# EAGLE board Timer_CMD (EAGLE 7.0.0)
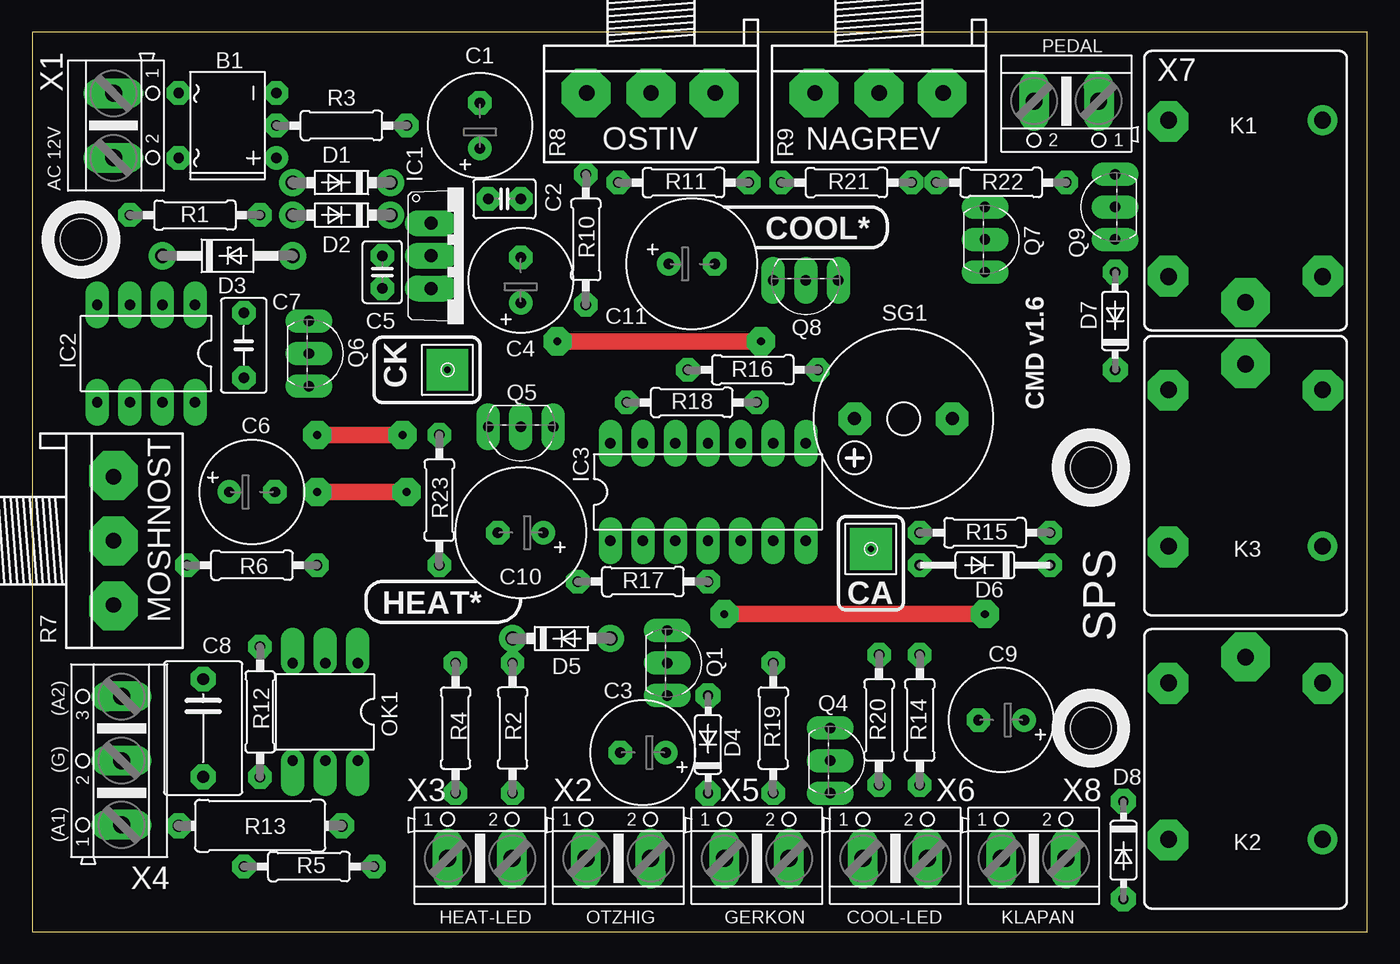
[diagram p0: board, top side]
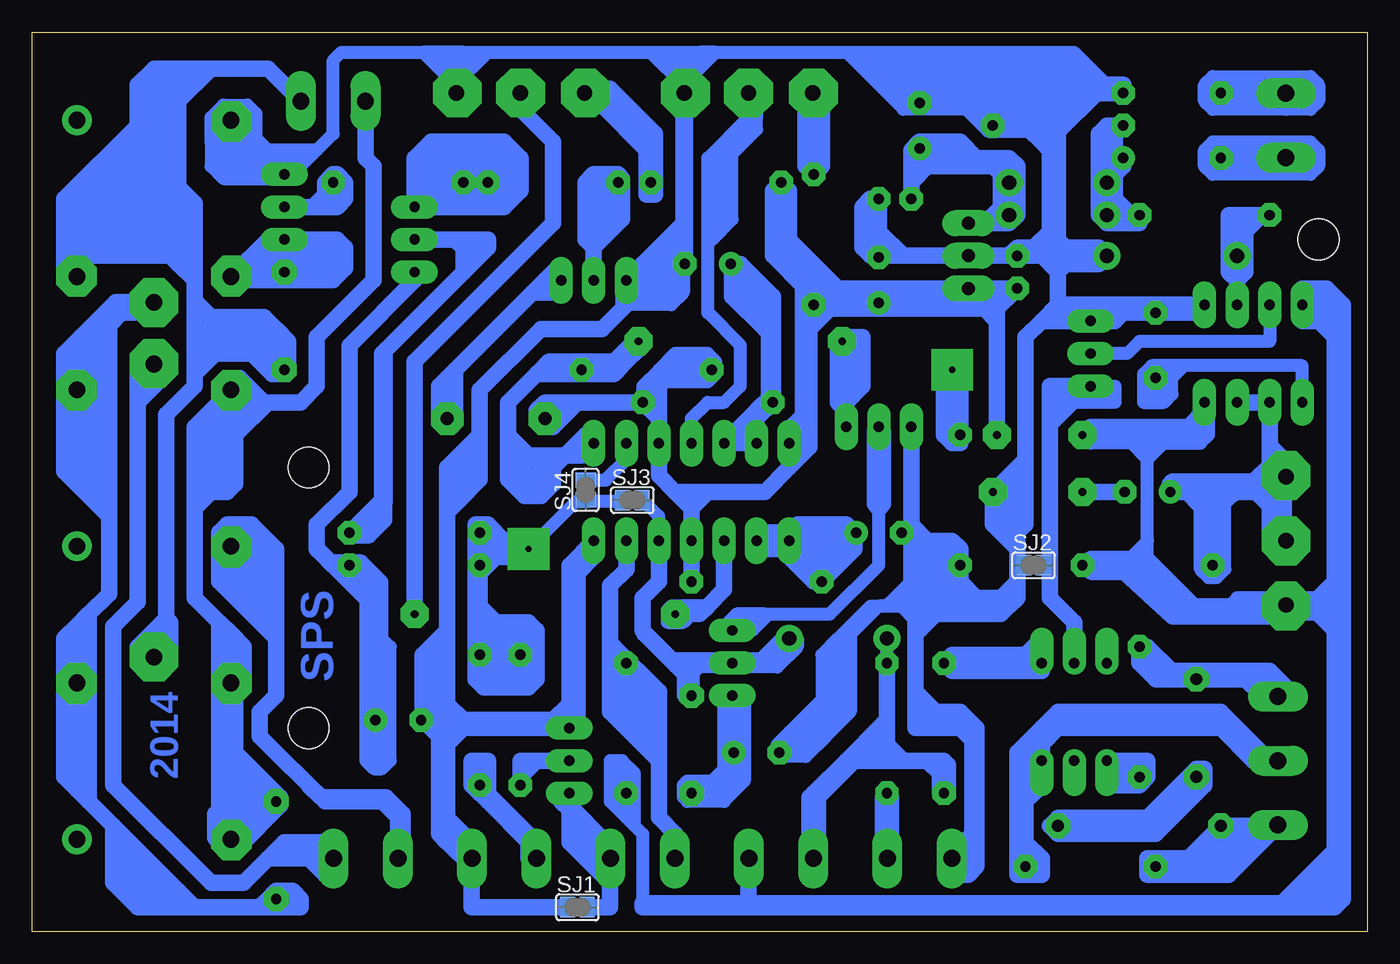
[diagram p1: board, bottom side, seen from below]

Size 104.12 x 70.16 mm. Coordinates in mm from the lower left corner, seen from the top.
Outline: 0,0 104.12,0 104.12,70.16 0,70.16 0,0
Copper layers (1*16): Top 0.035mm / dielectric 1.5mm / Bottom 0.035mm
Design rules "default *": minimum track width 10mil, minimum drill 24mil, track to track 8mil, track to pad 8mil, pad to pad 8mil, via to via 8mil, smd to smd 8mil, copper to edge 40mil, drill to drill 8mil, minimum pad ring 20mil, minimum via ring 8mil, stop-mask expansion 4mil, vias tented up to drill 0mil, thermal gap 10mil
Holes 3.2 mm at 3.81,53.98 82.55,36.2 82.55,15.88

## Footprints (pad centres in the part's own frame; a part is rotated, then mirrored left to right if it is on the bottom)
DB = drill 0.813: + -2.54,-3.81 | drill 0.813 octagon: - 2.54,-3.81; AC1 2.54,3.81; AC2 -2.54,3.81
E3,5-8 = drill 0.813 pad 1.6: + -1.778,0 | drill 0.813 pad 1.6 octagon: - 1.778,0
C025-030X050 = drill 0.813 octagon: 1 -1.27,0; 2 1.27,0
C050-035X075 = drill 0.813 octagon: 1 -2.54,0; 2 2.54,0
C075-063X106 = drill 0.914 octagon: 1 -3.81,0; 2 3.81,0
E3,5-10 = drill 0.813 pad 1.6: + -1.778,0 | drill 0.813 pad 1.6 octagon: - 1.778,0
DO41-7.6 = drill 1.1 pad 1.7: A 3.81,0; C -3.81,0
DO41Z10 = drill 1.118: A 5.08,0; C -5.08,0
DO35-7SQ = drill 0.813 pad 1.93 octagon: A 3.81,0; C -3.81,0
DO35-10_SQ = drill 0.813 pad 1.778 octagon: A 5.08,0; C -5.08,0
4MM-PAD-SQUARE = drill 0.5 pad 3.251 square: B2,8 0,0
TO220V = drill 1.016 long: 1 -2.54,-2.54; 2 0,-2.54; 3 2.54,-2.54
DIL-08 = drill 0.813 long: 1 -3.81,-3.81; 2 -1.27,-3.81; 3 1.27,-3.81; 4 3.81,-3.81; 5 3.81,3.81; 6 1.27,3.81; 7 -1.27,3.81; 8 -3.81,3.81
DIL14 = drill 0.813 long: 1 -7.62,-3.81; 2 -5.08,-3.81; 3 -2.54,-3.81; 4 0,-3.81; 5 2.54,-3.81; 6 5.08,-3.81; 7 7.62,-3.81; 8 7.62,3.81; 9 5.08,3.81; 10 2.54,3.81; 11 0,3.81; 12 -2.54,3.81; 13 -5.08,3.81; 14 -7.62,3.81
JS-M = drill 1.3: 1 6.7,6; 2 6.7,-6; C 8.7,0; NC -5.5,-6; NO -5.5,6
DIL06 = drill 0.813 offset: 1 -2.54,-3.81; 2 0,-3.81; 3 2.54,-3.81; 4 2.54,3.81; 5 0,3.81; 6 -2.54,3.81
TO92-EBC = drill 0.813 long: B 0,-1.27; C -2.54,-1.27; E 2.54,-1.27
0207/10 = drill 0.813 octagon: 1 -5.08,0; 2 5.08,0
3RP/1610N = drill 1.2 pad 2.184: 1 -5,0; 2 0,0; 3 5,0
0411/12 = drill 0.914 octagon: 1 -6.35,0; 2 6.35,0
F/CM12P = drill 1.016 pad 2.54 octagon: + 3.81,0; - -3.81,0
SJ = smd 1.168 x 1.6: 1 -0.762,0; 2 0.762,0
AK500/2 = drill 1.321 long: 1 -2.515,0; 2 2.515,0
AK500/3 = drill 1.321 long: 1 -5.004,0; 2 0,0; 3 5.004,0

## Placement (x,y rotation side)
B1  DB107  [DB]  15.24,62.86 90 top
C1  100uF 25v  [E3,5-8]  34.92,62.86 90 top
C2  100n  [C025-030X050]  36.83,57.15 0 top
C3  10uF 25v  [E3,5-8]  47.62,13.97 180 top
C4  100uF 25v  [E3,5-8]  38.1,50.8 90 top
C5  100n  [C025-030X050]  27.3,51.43 90 top
C6  470uF 25v  [E3,5-8]  17.14,34.29 0 top
C7  100n  [C050-035X075]  16.51,45.72 90 top
C8  0.01uF 400v  [C075-063X106]  13.34,15.88 270 top
C9  10uF 25v  [E3,5-8]  75.56,16.51 180 top
C10  HEAT*  [E3,5-10]  38.1,31.12 180 top
C11  COOL*  [E3,5-10]  51.44,52.07 0 top
D1  1N5819  [DO41-7.6]  24.13,58.42 180 top
D2  1N5819  [DO41-7.6]  24.13,55.88 180 top
D3  9V1  [DO41Z10]  15.24,52.7 0 top
D4  1N4148  [DO35-7SQ]  52.7,14.61 90 top
D5  1N5819  [DO41-7.6]  41.27,22.86 0 top
D6  1N4148SQ  [DO35-10_SQ]  74.3,28.58 180 top
D7  1N4148  [DO35-7SQ]  84.45,47.62 90 top
D8  1N4148  [DO35-7SQ]  85.09,6.35 270 top
DRILEGEND  [DRILEGEND]  109.02,67.2 0 top  (outside the outline)
H1  COOL  [4MM-PAD-SQUARE]  32.38,43.81 0 top
H2  COOL  [4MM-PAD-SQUARE]  65.41,29.85 0 top
IC1  7812TV  [TO220V]  33.66,52.7 270 top
IC2  NE555  [DIL-08]  8.89,45.09 180 top
IC3  NE556  [DIL14]  52.7,34.29 0 top
K1  JS-M1-12V-4  [JS-M]  94.61,57.78 270 top
K2  JS-M1-12V-4  [JS-M]  94.61,12.7 90 top
K3  JS-M1-12V-4  [JS-M]  94.61,35.56 90 top
OK1  MOC3052  [DIL06]  22.86,17.15 180 top
Q1  BC327-40  [TO92-EBC]  50.8,20.96 270 top
Q4  BC327-40  [TO92-EBC]  63.5,13.33 270 top
Q5  BC337-40  [TO92-EBC]  38.1,38.1 180 top
Q6  BC327-40  [TO92-EBC]  22.86,45.09 270 top
Q7  BC327-40  [TO92-EBC]  75.56,53.98 270 top
Q8  BC337-40  [TO92-EBC]  60.33,49.53 180 top
Q9  BC337-40  [TO92-EBC]  83.19,56.52 90 top
R1  1k  [0207/10]  12.7,55.88 180 top
R2  1k  [0207/10]  37.47,15.88 90 top
R3  100k  [0207/10]  24.13,62.86 0 top
R4  1k  [0207/10]  33.02,15.88 270 top
R5  330  [0207/10]  21.59,5.08 0 top
R6  470k  [0207/10]  17.14,28.58 0 top
R7  20k  [3RP/1610N]  6.35,30.48 270 top
R8  100k  [3RP/1610N]  48.26,65.41 180 top
R9  100k  [3RP/1610N]  66.04,65.41 180 top
R10  1k  [0207/10]  43.18,53.98 90 top
R11  1k  [0207/10]  50.8,58.42 0 top
R12  390  [0207/10]  17.78,17.15 270 top
R13  39  [0411/12]  17.78,8.26 180 top
R14  1k  [0207/10]  69.22,16.51 90 top
R15  1k  [0207/10]  74.3,31.12 180 top
R16  10k  [0207/10]  56.2,43.81 180 top
R17  10k  [0207/10]  47.62,27.31 0 top
R18  10k  [0207/10]  51.44,41.27 0 top
R19  10k  [0207/10]  57.78,15.88 270 top
R20  1k  [0207/10]  66.04,16.51 90 top
R21  1k  [0207/10]  63.5,58.42 0 top
R22  1k  [0207/10]  75.56,58.42 180 top
R23  1k  [0207/10]  31.75,33.66 90 top
SG1  F/CM12P  [F/CM12P]  67.94,40 180 top
SJ1  [SJ]  61.59,1.91 0 bottom
SJ2  [SJ]  26.04,28.58 0 bottom
SJ3  [SJ]  57.31,33.66 0 bottom
SJ4  [SJ]  60.96,34.45 90 bottom
X1  AC 12V  [AK500/2]  6.35,62.86 270 top
X2  OTZIG  [AK500/2]  45.72,5.71 0 top
X3  LED-HEAT  [AK500/2]  34.92,5.71 0 top
X4  TRIAC  [AK500/3]  6.99,13.33 90 top
X5  GERKON  [AK500/2]  56.52,5.71 0 top
X6  LED-COOL  [AK500/2]  67.31,5.71 0 top
X7  PEDAL  [AK500/2]  80.64,64.77 180 top
X8  KLAPAN  [AK500/2]  78.11,5.71 0 top

## Library data of the parts
B1 = rectifier
C1-C11 R1-R6 R10-R23 = rcl
D1-D8 = diode
DRILEGEND = drilegend
H1 H2 = holes
IC1 = linear
IC2 = st-microelectronics; MF: Arrow Electronics; MPN: NE555N; OC_FARNELL: 1467742; OC_NEWARK: 89K1486
IC3 = st-microelectronics; MPN: NE556; OC_FARNELL: 2349784; OC_NEWARK: 83C0108
K1-K3 = relay; MPN: JSM1-12V-4; OC_FARNELL: 910338; OC_NEWARK: 13P4552
OK1 = optocoupler; MF: FAIRCHILD SEMICONDUCTOR; MPN: MOC3042-M; OC_FARNELL: 1021368; OC_NEWARK: 72K8899
Q1 Q4 Q6 Q7 = transistor-pnp
Q5 Q8 Q9 = transistor-npn
R7-R9 = pot
SG1 = buzzer; OC_FARNELL: unknown; OC_NEWARK: unknown
SJ1-SJ4 = jumper
X1-X8 = con-ptr500; OC_FARNELL: unknown; OC_NEWARK: unknown

## Nets
CLSTR: Q1.C Q5.B
COOL: D6.A H2.B2,8 R14.2 R15.2 R20.2 SJ3.1 SJ4.1
FIM: IC2.3 Q6.B
GND: B1.- C1.- C2.2 C3.- C4.- C5.2 C6.- C7.2 C9.- C10.- C11.- D3.A IC1.2 IC2.1 IC3.7 K1.NC Q4.C Q5.E Q6.C Q8.E Q9.E R3.2 R8.1 R9.1 R23.1 SJ1.1 SJ2.1 X3.1 X6.2
LOCK: Q4.B R20.1
N$1: B1.+ D1.A D2.A R1.1 R3.1
N$2: C7.1 IC2.5
N$3: R2.1 X3.2
N$4: C3.+ D4.C Q1.E
N$5: OK1.4 R12.2
N$6: D3.C IC2.2 R1.2
N$7: D5.C R2.2 R4.2 X2.1
N$8: C8.1 R12.1 X4.3
N$10: C1.+ C2.1 D1.C D2.C IC1.1
N$11: C10.+ IC3.1 IC3.2 R17.1
N$12: B1.AC2 X1.2
N$13: B1.AC1 X1.1
N$14: D4.A D5.A IC3.5 Q1.B SJ3.2
N$15: OK1.2 Q6.E SJ2.2
N$17: C4.+ C5.1 IC1.3 IC2.4 IC2.8 IC3.4 IC3.10 IC3.14 R6.2 R7.3 R10.1 R11.1 R16.2 R17.2 R18.2 R19.2 SG1.+ X2.2
N$18: R5.1 R13.2 X4.1
N$19: C8.2 R13.1
N$20: Q7.B R15.1
N$22: Q7.C R21.2 R22.2
N$23: D7.A K1.2 Q9.C
N$24: Q8.B R21.1
N$25: C11.+ IC3.12 IC3.13 R18.1
N$27: D7.C K1.1 K2.C X7.1
N$28: IC3.3 R9.2
N$29: R9.3 R11.2
N$30: IC3.11 R8.2
N$31: Q4.E SJ1.2 X5.2
N$32: R8.3 R10.2
N$33: IC3.6 R19.1 X5.1
N$34: C9.+ D6.C Q7.E
N$35: Q9.B R22.1
N$36: D8.C K2.1 K2.NO K3.1 X7.2
N$37: Q8.C SG1.-
N$38: OK1.6 R5.2 X4.2
N$40: D8.A K1.C K2.2 K3.2
N$41: K3.NO X8.1
N$42: R14.1 X6.1
N$43: H1.B2,8 R23.2
N$53: IC3.9 SJ4.2
N$64: C6.+ IC2.6 IC2.7 R6.1 R7.1 R7.2
N$65: OK1.1 R4.1
N$66: IC3.8 Q5.C R16.1
N$68: K3.C X8.2

## Tracks (layer width: path | path; a pad name or v marks a point on that pad's centre or on a via)
CLSTR
  Bottom 1.016: Q1.C 48.26,23.5 46.99,24.77 | 46.99,24.77 46.67,24.77 | 46.67,24.77 41.91,24.77 38.1,28.58 38.1,33.02 | 46.99,24.77 49.21,24.77 50.48,23.5 47.94,23.5 46.67,24.77 | 46.99,24.77 48.26,24.77 48.9,24.13
  Bottom 1.27: Q5.B 38.1,33.02 | 38.1,33.02 37.78,33.34 37.78,39.05 38.42,39.05 38.42,33.34 38.1,33.02
COOL
  Bottom 1.016: SJ3.1 58.67,33.53 60.8,33.53 SJ4.1 61.12,33.53 61.72,33.53 H2.B2,8
  Bottom 1.27: R15.2 69.22,29.85 | 69.22,29.85 D6.A 69.22,27.94 | 69.22,27.94 69.22,25.4 | 69.22,24.13 R14.2 | R14.2 R20.2 66.04,19.05 | H2.B2,8 66.67,29.85 | 67.31,29.85 69.22,29.85 | 66.04,19.05 65.41,19.05 64.77,19.69 64.77,23.5 65.41,24.13 67.94,24.13 69.22,25.4 | R14.2 69.22,19.69 68.58,19.05 | 68.58,19.05 66.04,19.05 | 68.58,19.05 68.9,19.05 69.53,19.69 69.53,30.48 69.53,31.43 | 69.22,31.75 68.58,31.75 67.31,30.48 | 68.58,30.48 67.31,30.48 | 67.31,30.48 66.67,29.85 | 66.67,29.85 67.31,29.85 | 67.31,29.85 69.22,27.94 | 69.22,25.4 69.22,24.13 | 69.22,24.13 67.94,22.86 66.04,22.86 65.41,23.5 65.41,22.23 68.58,22.23 68.58,20.32 66.67,20.32 | 69.53,31.43 69.22,31.75 | 69.22,31.75 69.53,31.75 69.53,31.43
FIM
  Bottom 1.016: IC2.3 7.62,46.04 17.78,46.04 18.73,45.09 Q6.B
GND  (via drill 0.6 pad 2.18)
  Top 1.27: v22.23,34.29 v29.21,34.29
  Bottom 1.016: 52.7,68.58 53.26,68.03 53.81,68.58 | 52.7,68.58 52.07,68.58 | 50.8,68.58 40.64,68.58 | 39.37,68.58 38.73,68.58 | 38.73,68.58 37.47,68.58 | 71.04,68.03 70.48,68.58 | 70.48,68.58 68.58,68.58 | 68.58,68.58 55.88,68.58 | 55.88,68.58 53.81,68.58 | C3.- 45.85,14.48 45.09,15.24 44.77,15.24 | 44.77,15.24 42.55,15.24 | 42.55,15.24 41.91,15.88 | 41.91,15.88 41.27,16.51 41.27,16.83 | 41.27,16.83 41.27,22.86 | 41.27,22.86 38.73,25.4 35.88,25.4 35.24,25.4 | 81.92,60.96 80.64,62.23 80.64,67.95 80.01,68.58 73.66,68.58 | 71.36,68.58 71.04,67.95 | SJ1.1 62.87,1.91 | 69.85,1.91 69.85,5.08 69.85,5.69 X6.2 | SJ2.1 27.3,28.58 | 34.92,66.04 36.83,67.95 | 36.83,67.95 37.47,68.58 | 31.11,64.14 36.2,64.14 40.64,68.58 | 40.64,68.58 39.37,68.58 | 39.37,68.58 38.73,67.95 | 38.73,67.95 35.56,64.77 30.48,64.77 | 50.8,68.58 53.34,66.04 55.88,68.58 | 53.81,68.58 52.7,68.58 | 50.8,68.58 52.07,68.58 | 52.07,68.58 53.34,67.31 | 68.58,68.58 71.12,66.04 73.66,68.58 | 70.48,68.58 71.36,68.58 | 71.36,68.58 72.71,68.58 | 72.71,68.58 73.66,68.58 | 72.39,67.95 72.71,68.58 | 34.92,25.4 38.1,25.4 40.32,23.18 40.32,17.15 41.91,15.56 | 42.23,15.24 42.55,15.24 | 44.77,15.24 45.72,14.29 46.04,14.29 46.04,14.61 45.09,15.56 | 45.09,15.56 44.13,15.56 | 43.18,15.56 42.55,15.56 41.27,16.83 | 41.27,22.86 42.55,21.59 42.55,17.15 44.13,15.56 | 44.13,15.56 43.18,15.56 | 43.18,15.56 41.91,16.83 41.91,18.73 | 41.91,18.73 41.91,21.59 | 45.09,15.56 41.91,18.73 | 41.91,15.88 41.91,15.56 | 41.91,15.56 42.23,15.24 | 42.23,15.24 43.81,13.65 45.4,13.65 | 46.04,13.65 45.4,13.65 | 45.4,13.65 44.45,14.61 43.18,14.61 | 53.34,53.34 53.34,49.85 54.29,48.89 58.1,48.89 58.1,49.53 56.2,51.43 53.98,51.43 53.98,50.16 54.29,49.85 56.83,49.85
  Bottom 1.016: 56.83,49.85 57.15,49.53 | 56.83,49.85 55.88,50.8 54.61,50.8 54.29,51.12 | Q9.E 83.82,59.05 81.92,60.96 | 81.92,60.96 86.36,60.96 88.9,63.5 88.9,62.86 90.17,61.59 | 90.17,61.59 90.17,59.69 89.22,58.74 | 89.22,58.74 83.5,58.74 83.5,60.01 83.19,60.32 87,60.32 87.63,60.96 88.27,61.59 87.63,61.59 85.72,59.69 | 85.72,59.69 83.82,59.69 | 85.72,59.69 89.53,59.69 89.53,61.59 | 88.9,59.05 89.22,58.74 | 90.17,61.59 90.17,63.5 89.22,64.45 87.31,64.45 86.68,63.82 86.68,61.91 85.41,60.64 | 38.73,67.95 38.73,68.58 | 37.47,68.58 22.86,68.58 20.32,66.04 20.95,66.04 22.86,67.95 36.2,67.95 | 36.83,67.95 36.2,67.95 | 36.2,67.95 34.92,66.68 22.86,66.68 | 22.23,66.68 22.86,66.68 | 22.86,66.68 23.5,67.31 34.92,67.31 | 20.95,65.41 24.13,62.23 24.13,63.5 22.23,65.41
  Bottom 1.27: 24.13,65.41 22.23,65.41 20.95,65.41 B1.- 19.05,66.04 20.32,66.04 34.92,66.04 34.29,65.41 | 24.13,65.41 27.3,65.41 | 27.3,65.41 29.21,65.41 | 29.21,65.41 31.11,65.41 | 31.11,65.41 34.29,65.41 | 34.29,65.41 C1.- | 29.21,65.41 R3.2 29.21,62.55 | 24.13,52.7 24.13,53.98 | 24.13,53.98 24.13,60.32 | 24.13,60.96 24.13,62.23 24.13,65.41 | IC2.1 16.51,48.89 | 16.51,48.89 21.59,48.89 | Q6.C 21.59,48.89 | X3.1 32.38,5.71 | 32.38,5.71 30.48,5.71 | 30.48,5.71 30.48,14.61 | 30.48,14.61 30.48,15.88 | 30.48,15.88 35.24,15.88 35.24,23.18 | 35.24,23.18 35.24,23.34 | 35.24,23.34 35.24,25.4 | 26.67,34.29 26.67,31.75 27.3,31.12 | 26.67,34.29 26.67,36.83 | 26.67,36.83 26.67,46.35 25.4,47.62 | Q4.C 62.23,17.78 | 62.23,19.05 62.23,27.31 | 62.23,27.31 62.23,28.58 IC3.7 60.33,29.21 61.59,27.94 | 53.26,68.03 R8.1 53.21,65.36 C11.- 55.24,52.07 | R9.1 71.04,67.95 71.04,68.03 | K1.NC 88.61,60.67 87,59.05 Q9.E | Q4.C 70.48,15.88 | 70.48,15.88 71.75,15.88 | 71.75,16.51 71.75,17.78 | 71.75,17.78 71.75,22.23 | 71.75,23.5 71.75,32.7 | 71.75,32.7 71.75,33.97 | 71.75,33.97 71.75,36.2 69.22,38.73 | 69.22,38.73 69.22,42.23 64.45,46.99 59.69,46.99 57.78,48.89 Q8.E 56.52,52.07 | X6.2 71.73,7.64 71.75,8.26 | IC1.2 27.94,52.7 | 27.94,52.7 C5.2 | C5.2 25.4,52.7 | 25.4,52.7 24.13,52.7 | 21.59,48.89 24.13,48.89 | 24.13,48.89 25.4,47.62 | 35.24,25.4 35.24,27.46 | 35.24,27.46 35.24,30.16 35.56,30.48 | 35.56,30.48 36.2,30.99 C10.- | C7.2 16.51,48.89 | Q5.E 35.56,31.75 | 35.56,31.75 35.56,30.48 | 71.75,8.26 71.75,8.89 | 71.75,8.89 71.75,14.61 | 71.75,14.61 71.75,15.88 | C9.- 73.66,16.51 | 73.03,16.51 72.39,16.51 | 72.39,16.51 71.75,16.51 | C6.- v22.23,34.29 | v29.21,34.29 26.67,34.29 | 33.18,25.4 34.92,25.4 35.24,25.4
  Bottom 1.27: 31.75,27.31 R23.1 31.75,29.85 32.38,30.48 34.29,30.48 35.56,31.75 | 31.75,27.31 31.75,25.4 | IC1.2 36.2,52.7 | 36.2,52.7 37.97,52.7 C4.- C2.2 | 27.3,31.12 27.3,29.85 | 27.3,29.85 27.3,28.58 27.3,27.31 | 27.3,27.31 27.3,26.04 | 27.3,26.04 27.94,25.4 | 27.94,25.4 31.75,25.4 | 31.75,25.4 33.18,25.4 | 35.24,23.34 33.18,25.4 | 33.18,25.4 35.24,27.46 | 35.24,27.46 37.15,25.56 36.35,25.56 35.08,24.29 | 22.86,52.7 24.13,52.7 | 24.13,52.7 24.13,52.07 | 24.13,52.07 24.13,51.43 | 24.13,51.43 24.13,48.89 | D3.A 22.86,52.7 | 22.86,52.7 24.13,51.43 | 24.13,51.43 25.4,52.7 | 25.4,52.7 24.13,53.98 | 24.13,53.98 22.86,52.7 | D3.A 20.95,53.34 26.04,53.34 | 26.04,53.34 26.67,53.34 | 26.67,53.34 C5.2 | 26.67,53.34 27.3,53.34 27.94,52.7 | C5.2 D3.A | D3.A 20.95,52.07 24.13,52.07 | C2.2 38.1,54.61 36.2,52.7 | 31.11,65.41 31.11,64.14 | 31.11,64.14 29.53,62.55 29.21,62.55 | 29.21,62.55 28.89,62.55 | 28.89,62.55 27.3,64.14 | 27.3,64.14 27.3,65.41 | 27.3,65.41 28.57,64.14 29.84,64.14 30.48,64.77 | 28.89,62.55 26.35,62.55 25.4,61.59 | 24.77,60.96 24.13,60.32 | 24.13,60.32 24.13,60.96 | 24.13,60.96 26.67,63.5 27.3,63.5 27.3,64.14 | 27.3,64.14 26.67,64.77 26.67,64.14 24.77,62.23 | 24.77,62.23 24.77,63.5 | 24.77,63.5 26.04,64.77 25.4,64.77 24.77,64.14 24.77,63.5 | 24.77,62.23 25.4,61.59 | 25.4,61.59 24.77,60.96 | 24.77,60.96 24.77,54.61 26.04,53.34 | C2.2 38.73,57.15 39.37,56.52 39.37,53.34 38.73,52.7 IC1.2 | 25.4,47.62 19.68,47.62 19.05,48.26 12.7,48.26 | 29.84,64.77 30.48,64.77 | 30.48,64.77 31.11,64.14 | 35.56,64.77 35.56,65.41 38.1,67.95 | 53.34,67.31 53.98,67.31 54.61,67.95 | 71.12,65.41 71.12,66.04 71.12,66.68 72.39,67.95 69.85,67.95 | 32.38,5.71 32.38,4.45 31.11,4.45 30.48,5.08 30.48,5.71
  Bottom 1.27: 30.48,15.88 31.75,17.15 33.66,17.15 34.92,18.42 34.92,17.15 34.29,16.51 32.38,16.51 30.8,14.92 | 30.48,14.61 30.8,14.92 | 30.8,14.92 30.8,7.62 32.07,6.35 | 34.92,25.08 35.56,25.08 35.88,25.4 | 26.67,36.83 v29.21,34.29 | v29.21,34.29 29.21,31.75 27.3,29.85 | 27.3,31.12 27.3,34.92 28.57,33.66 28.57,32.38 27.94,31.75 | 27.3,27.31 28.57,26.04 30.48,26.04 31.75,27.31 | 35.56,30.48 35.56,27.31 34.29,27.31 33.02,26.04 32.38,26.04 32.38,29.21 33.02,29.85 34.29,29.85 34.29,28.58 33.02,27.31 33.02,28.58 33.66,29.21 | 27.94,26.04 27.3,26.04 | 27.94,25.4 28.57,24.77 33.66,24.77 35.24,23.18 | 53.34,64.77 53.34,55.24 56.52,52.07 | 56.52,52.07 55.24,52.07 | 55.24,52.07 53.98,53.34 53.34,53.34 | 62.23,27.31 61.59,27.94 | 61.59,27.94 61.59,18.42 | 61.59,18.42 61.59,15.88 Q4.C | 61.59,18.42 62.23,19.05 | 62.23,19.05 62.23,17.78 | 62.23,17.78 63.5,16.51 70.48,16.51 71.75,17.78 | 71.75,16.51 71.75,15.88 | 70.48,15.88 71.75,14.61 | 71.75,14.61 73.66,16.51 | 73.66,16.51 73.03,16.51 | 73.03,16.51 71.75,17.78 | 71.75,8.89 69.85,6.98 69.85,1.91 62.87,1.91 | 71.75,8.26 71.75,6.98 | 71.75,6.98 69.85,5.08 | 71.75,6.98 72.39,7.62 72.39,16.51 | 69.22,38.73 69.22,35.24 70.8,33.66 | 70.8,33.66 71.44,33.97 | 71.75,33.97 71.44,33.97 | 71.44,33.97 69.85,35.56 69.85,36.83 | 69.85,37.15 69.85,36.83 | 69.85,36.83 71.12,35.56 71.12,34.29 70.8,33.66 | 70.8,33.66 71.75,32.7 | 73.66,16.51 73.66,21.59 71.75,23.5 | 71.75,23.5 71.75,22.23 | 71.75,22.23 73.03,20.96 73.03,17.15 | 87.63,60.96 87.63,63.5 88.9,63.5 89.53,62.86
LOCK
  Bottom 1.27: 64.77,13.33 66.04,13.33 R20.1 66.04,12.06 64.77,13.33 | 64.77,13.33 Q4.B
N$1
  Bottom 1.27: D1.A D2.A 19.68,55.88 | B1.+ 20.32,60.32 | 19.68,62.86 R3.1 20.32,61.59 | 19.68,62.86 20.32,62.86 | 20.32,62.86 20.32,61.59 | 20.32,61.59 20.32,60.32 | D1.A 20.32,60.32 | 18.41,55.88 R1.1 17.78,55.24 20.32,55.24 20.95,55.88 20.95,62.23 20.32,62.86 | 20.32,61.59 B1.+ | B1.+ 19.05,59.69 D1.A | D1.A 20.32,57.78 18.41,55.88 | 18.41,55.88 19.68,55.88 | 19.68,55.88 19.68,62.86
N$2
  Bottom 1.016: IC2.5 5.08,44.13 14.29,44.13 | 14.61,44.13 15.56,44.13 | C7.1 15.56,44.13 | 15.56,44.13 16.83,44.13 17.46,43.5 17.46,41.27 15.88,41.27 15.24,41.91 15.24,43.18 14.29,44.13 | 14.29,44.13 14.61,44.13 | 14.61,44.13 16.19,42.54 16.19,41.91 16.83,41.91 16.83,42.86
N$3
  Bottom 1.27: 37.47,5.71 37.47,6.67 37.15,6.98 37.15,10.48 R2.1 | X3.2 37.44,10.77 R2.1 | R2.1 37.78,10.48 37.78,5.71
N$4
  Bottom 1.016: Q1.E 49.21,18.42 48.58,18.42 48.58,11.75 50.16,10.16 53.02,10.16 53.34,10.48 53.34,11.43 53.02,11.75 51.12,11.75 50.16,12.7 50.16,17.78 50.8,18.42 Q1.E
  Bottom 1.27: D4.C 50.8,10.79 49.53,12.06 49.53,13.84 C3.+ 49.53,14.1 Q1.E
N$5
  Bottom 1.27: R12.2 20.32,12.06 OK1.4 | OK1.4 17.14,13.33 17.14,12.06 17.78,11.43 20.32,11.43 OK1.4
N$6
  Bottom 1.27: 10.16,50.8 D3.C 10.16,55.88 | 10.16,50.8 IC2.2 | 10.16,55.88 9.53,55.88 R1.2 8.26,55.88 9.53,54.61 9.53,51.43 10.16,50.8 | 10.16,50.8 10.79,51.43 10.79,55.88 10.16,55.88
N$7
  Bottom 1.016: R2.2 D5.C
  Bottom 1.27: 33.02,12.06 R4.2 32.7,11.11 32.7,13.02 33.02,13.33 | 33.02,12.06 33.02,13.33 | 33.02,13.33 34.29,13.33 | R2.2 37.47,14.61 | 37.47,14.61 37.47,13.33 | X2.1 43.18,5.71 43.18,10.16 | 43.18,10.16 43.18,10.79 | 43.18,10.79 40.64,13.33 | 40.64,13.33 40.01,13.33 | 38.73,13.33 37.47,13.33 | 37.47,13.33 36.2,13.33 | 34.29,13.33 33.34,12.38 | 33.02,12.06 33.34,12.38 | 33.34,12.38 33.34,10.79 | 34.29,13.33 36.2,13.33 | 36.2,13.33 37.47,14.61 | 37.47,14.61 38.73,13.33 | 38.73,13.33 40.01,13.33 | 40.01,13.33 42.86,10.48 | 43.18,10.16 42.86,10.48 | 42.86,10.48 42.86,5.4 43.18,5.4 43.5,5.71 43.5,10.48 43.18,10.79 | 40.64,13.33 37.78,16.19 37.78,15.24 39.05,13.97
N$8
  Bottom 1.27: X4.3 6.99,18.42 | 6.99,18.42 6.99,19.69 C8.1 | R12.1 17.78,20.96 16.51,19.69 C8.1 | 6.99,18.42 5.71,18.42 7.62,20.32 15.24,20.32 17.14,22.23 R12.1 | R12.1 15.88,20.32 | C8.1 9.53,19.69 8.26,18.42
N$9
  Bottom 1.27: 31.75,43.81 31.75,38.1 32.38,38.1 33.02,38.73 33.02,43.81 31.75,43.81
N$10
  Bottom 1.27: 27.94,60.32 D1.C D2.C 28.57,55.24 | C1.+ 34.29,60.32 | 34.29,60.32 30.48,60.32 | 30.48,60.32 27.94,60.32 | 29.84,55.24 28.57,55.24 | C2.1 35.56,58.42 | 35.56,58.42 35.56,59.05 | 35.56,59.05 34.29,60.32 | IC1.1 29.84,55.24 | 29.84,55.24 28.57,56.52 28.57,59.05 29.21,59.69 34.29,59.69 35.56,58.42 | 35.56,59.05 35.56,60.96 34.92,61.59 31.75,61.59 30.48,60.32 | 28.57,55.24 27.94,55.24 27.3,55.88 27.3,59.69 27.94,60.32
N$11
  Bottom 1.27: IC3.2 IC3.1 43.81,29.21 | R17.1 43.81,29.21 | C10.+ 40.01,31.12 | 40.01,31.12 42.55,31.12 | 42.55,31.12 43.81,29.85 43.81,29.21 | 40.01,31.12 40.01,29.85 R17.1 | R17.1 43.18,27.31 45.09,29.21 45.09,31.12 | 45.09,31.12 44.45,31.75 40.64,31.75 40.01,31.12 | 42.55,31.12 44.45,31.12 44.45,30.48 42.55,28.58 41.91,28.58 40.64,29.85 41.27,30.48 42.55,30.48 43.18,29.85 | 43.18,29.85 41.91,29.85 | 43.18,29.85 47.62,29.85 47.62,31.12 45.09,31.12
N$12
  Bottom 1.27: 11.43,60.35 B1.AC2
  Bottom 1.778: X1.2 11.43,60.35
N$13
  Bottom 1.016: B1.AC1 11.43,64.77 6.35,64.77 | 6.35,64.77 6.35,64.14 | 6.35,64.14 12.06,64.14 12.7,64.77 12.7,66.04 12.06,66.68 4.45,66.68 3.81,66.04 3.81,64.77 4.45,64.14 6.35,64.14 | 6.35,64.77 5.08,64.77 | 5.08,64.77 4.45,65.41 5.08,66.04 5.71,66.04 5.71,65.41 5.08,64.77
  Bottom 1.27: 11.43,65.38 B1.AC1
  Bottom 1.778: X1.1 11.43,65.38
N$14
  Bottom 1.016: 44.77,22.86 44.45,22.86 44.45,22.23 46.04,20.64 52.07,20.64 52.7,20 53.34,20.64 | IC3.5 55.24,32.38 56.52,33.66 SJ3.2 | 53.66,20.96 53.34,20.64 | 53.34,20.64 53.98,20.64 | 53.98,20.64 54.61,21.27 | 54.61,21.27 56.52,23.18 56.52,24.13 | D5.A 45.09,23.18 45.4,23.18 47.31,21.27 54.61,21.27 | D4.A 53.34,18.42 53.34,20 53.98,20.64
  Bottom 1.27: IC3.5 55.24,27.31 56.52,26.04 56.52,24.13 56.52,23.5 53.98,20.96 53.66,20.96 52.7,20.96 | D5.A 46.99,20.96 Q1.B 52.7,20.96 | D4.A 52.7,20 52.7,20.96
N$15
  Bottom 1.016: SJ2.2 24.77,28.58 | 20.32,42.54 Q6.E 19.68,42.54 19.68,41.27 22.86,41.27 24.77,39.37 24.77,40.64 23.5,41.91
  Bottom 1.27: Q6.E 24.77,42.54 24.77,39.37 24.77,28.58 24.77,26.04 22.86,24.13 OK1.2
N$16  (via drill 0.6 pad 3.81)
  other vias: 6.35,30.48
N$17  (via drill 0.6 pad 2.18, 0.6 pad 3.81)
  Top 1.27: v22.23,38.73 v28.89,38.73
  Bottom 1.016: 50.8,43.81 50.8,44.45 51.44,45.09 53.98,45.09 55.24,43.81 | v6.35,25.4 3.81,25.4 3.17,24.77 3.17,26.04 10.16,26.04 10.79,25.4 13.34,25.4 17.14,29.21 | R16.2 55.24,43.81 | 55.24,43.81 56.52,42.54 | 56.52,42.54 R18.2 | R7.3 15.32,25.48 17.14,27.31 | 17.14,27.31 17.14,28.58 | 17.14,28.58 17.14,29.21 | 17.14,29.21 17.14,30.48 | 17.14,30.48 17.14,36.83 | 17.14,36.83 17.14,38.1 | 17.14,38.1 17.14,38.73 | 45.09,38.73 45.09,39.37 44.13,40.32 44.13,47.94 | R6.2 18.41,28.58 | R19.2 57.78,10.16 57.78,8.89 | 57.15,8.26 56.52,7.62 56.52,2.22 55.88,1.91 | 44.13,47.94 R10.1 | R11.1 45.72,53.34 44.13,51.75 | 44.13,51.75 42.23,49.85 | 44.13,47.94 44.13,51.12 | 44.13,51.75 44.13,51.12 | 44.13,51.12 43.18,50.16 43.18,49.53 43.81,48.89 | 12.7,38.73 15.24,38.73 17.14,36.83 | 17.14,36.83 18.41,38.1 | 19.05,38.73 18.41,38.1 | 18.41,38.1 21.59,38.1 v22.23,38.73 | 17.14,38.1 13.02,38.1 12.38,38.73 12.38,40.96 IC2.8 | 17.14,29.21 18.41,29.21 | R6.2 21.59,29.21 18.41,29.21 | R6.2 21.59,27.94 19.05,27.94 15.24,24.45 6.35,24.45 | 15.24,24.77 2.54,24.77 | 13.97,25.4 17.14,28.58 | 17.14,28.58 18.41,28.58 | 18.41,28.58 17.14,27.31 | 18.41,29.21 17.14,30.48 | 57.78,8.89 57.47,8.57 | 57.47,8.57 57.15,8.26 | 57.15,8.26 57.15,12.38 58.1,13.33 59.05,13.33 59.05,10.16 57.78,8.89 | 57.47,8.57 57.47,11.75 58.42,12.7 58.42,11.11 58.1,10.79 | 56.52,42.54 55.88,42.54 53.98,44.45 51.44,44.45 50.8,43.81 | 50.8,43.81 50.8,43.5 51.44,42.86 54.93,42.86 55.56,42.23 55.56,40.64
  Bottom 1.27: R7.3 2.54,25.48 | 2.54,25.48 2.54,27.31 | 2.54,27.31 2.54,46.35 | 2.54,46.35 2.54,48.89 IC2.4 | 48.26,1.91 48.26,5.71 X2.2 | 48.26,1.91 47.31,1.91 | 47.31,1.91 6.99,1.91 | 5.71,1.91 2.54,1.91 | 2.54,3.17 2.54,6.35 | 2.54,8.26 2.54,24.77 2.54,25.48 | 52.7,33.02 IC3.4 R17.2 | 52.7,33.02 53.98,34.29 | 53.98,34.29 55.24,35.56 IC3.10 55.24,40 | 51.44,34.29 46.99,34.29 45.09,36.2 | 51.44,34.29 52.7,33.02 | 55.24,40 R18.2 61.59,41.27 | 28.89,50.16 C5.1 29.21,48.26 IC1.3 | 28.89,50.16 IC1.3 | 45.09,38.73 IC3.14 | IC2.8 12.7,40.64 | v28.89,38.73 28.89,47.62 | 28.89,47.62 28.89,50.16 | 61.59,41.27 62.87,41.27 | 62.87,41.27 SG1.+ | IC1.3 38.1,50.16 | 41.27,50.16 41.91,50.16 | 41.91,50.16 42.23,49.85 R10.1 | C4.+ 38.1,50.16 | IC1.3 30.48,50.16 29.84,49.53 37.47,49.53 38.1,48.89 | 38.1,48.89 R10.1 | R10.1 42.55,48.89 41.27,50.16 | 41.91,50.16 43.18,50.16 43.81,50.16 46.35,52.7 46.35,53.98 | R11.1 45.09,57.78 45.09,53.98 | 45.09,53.98 45.09,53.34 45.72,53.34 46.35,53.98 | 46.35,53.98 46.35,57.78 R11.1 | R11.1 45.72,54.61 46.35,53.98 | 38.1,50.16 41.27,50.16 | 41.27,50.16 45.09,53.98 | IC3.14 43.81,39.37 43.81,46.67 | 43.81,46.67 43.81,48.26 R10.1 | R10.1 43.18,48.58 43.5,48.26 43.5,39.37 | 43.5,39.37 44.77,38.1 IC3.14 | 38.1,48.89 30.16,48.89 29.84,48.58 | 29.84,48.58 28.89,47.62 | 29.21,48.89 29.53,48.89 29.84,48.58 | 29.84,48.58 41.91,48.58 43.81,46.67 | IC2.4 5.08,50.16 3.17,50.16 1.91,48.89 1.91,46.99 | 1.91,46.99 1.91,22.86 | 1.91,22.86 1.91,7.62 | 1.91,7.62 1.91,2.54 2.54,1.91 | 2.54,1.91 2.54,3.17 | 2.54,3.17 3.49,2.22 47.62,2.22 | 47.62,2.22 56.52,2.22 56.52,1.91 55.88,1.91 48.26,1.91 | 47.62,2.22 47.31,1.91 | 1.91,22.86 4.45,25.4 2.54,27.31
  Bottom 1.27: IC2.4 3.81,48.89 1.91,46.99 | IC2.4 5.08,47.62 3.81,47.62 2.54,46.35 | 12.7,40.64 13.97,39.37 21.59,39.37 v22.23,38.73 19.05,38.73 17.14,38.73 12.7,38.73 12.7,40.64 | 43.5,39.37 43.5,37.78 45.09,36.2 | 45.09,36.2 IC3.14 | 55.24,40 55.24,42.54 54.61,43.18 | 51.44,34.29 53.98,34.29 | 62.87,41.27 64.14,41.27 64.77,40.64 64.77,40 64.14,39.37 63.5,39.37 61.59,41.27 | 1.91,7.62 2.54,8.26 | 2.54,8.26 2.54,6.35 | 2.54,6.35 6.99,1.91 | 6.99,1.91 5.71,1.91 | 5.71,1.91 3.17,4.45 3.17,3.17 3.81,2.54 | 57.78,10.16 58.42,10.16
N$18
  Bottom 1.27: R13.2 6.99,8.26 | 6.99,8.26 6.43,8.26 X4.1 | R13.2 11.43,6.98 12.7,5.71 | 12.7,5.71 13.34,5.08 | 13.34,5.08 14.61,5.08 | 14.61,5.08 R5.1 | 6.99,8.26 10.16,5.08 | 10.16,5.08 10.79,5.08 | 10.79,5.08 8.26,7.62 9.53,7.62 11.43,5.71 11.43,6.35 10.16,7.62 10.79,7.62 R13.2 | R13.2 14.61,5.08 | 13.34,5.08 10.79,5.08 | 10.16,5.08 10.79,4.45 15.88,4.45 | 15.88,4.45 R5.1 | R5.1 15.88,5.71 | 15.88,5.71 12.7,5.71 | 15.88,5.71 16.51,5.71 | 17.14,5.08 16.51,5.71 | 16.51,5.71 17.14,5.71 17.14,4.45 15.88,4.45
N$19
  Bottom 1.27: C8.2 17.14,8.26 R13.1 24.77,8.26 | 24.77,8.26 24.13,8.89 17.14,8.89 13.34,12.7 12.7,12.7 12.7,11.43 16.51,7.62 24.13,7.62 24.77,8.26
N$20
  Bottom 1.016: R15.1 79.38,30.8 77.79,30.8 76.52,32.07 76.52,33.34 | 76.52,45.4 76.52,33.34 | 76.52,33.34 78.11,31.75
  Bottom 1.27: R15.1 76.83,33.66 76.83,45.09 76.52,45.4 70.48,51.43 | 70.48,51.43 70.48,53.34 | 70.48,53.34 71.12,53.98 | 71.12,53.98 Q7.B | 70.48,51.43 68.58,53.34 | 68.58,53.34 69.22,53.98 | 69.22,53.98 69.85,53.98 | 69.85,53.98 71.12,53.98 | 70.48,53.34 69.85,52.7 69.85,53.98 | 69.22,53.98 68.58,53.98 68.58,53.34
N$21
  Bottom 1.016: 6.35,60.32 6.35,61.59 | 5.08,61.59 4.45,61.59 3.81,60.96 3.81,59.69 4.45,59.05 12.06,59.05 12.7,59.69 12.7,60.96 12.06,61.59 6.35,61.59 | 6.35,61.59 5.08,61.59 | 5.08,61.59 4.45,60.96 4.45,60.32 5.08,59.69 5.71,59.69 5.71,60.32 5.08,60.96 5.71,60.96
N$22
  Bottom 1.27: 73.66,58.42 74.3,57.78 Q7.C | 73.66,58.42 R22.2 R21.2 66.04,58.42 | 66.04,58.42 66.04,60.32 67.31,61.59 70.48,61.59 | 70.48,61.59 73.66,58.42 | Q7.C 67.31,56.52 66.04,57.78 66.04,58.42 | 66.04,58.42 67.31,57.15 73.03,57.15 73.66,57.78 70.48,60.96 67.94,60.96 66.67,59.69 71.12,59.69 71.75,59.05 67.31,59.05 | Q7.C 74.3,60.32 73.03,61.59 72.39,61.59 | 70.48,61.59 72.39,61.59 | 72.39,61.59 73.66,60.32 73.66,59.69 | 73.66,59.05 73.66,59.69 | 73.66,59.69 72.39,60.96
N$23  (via drill 0.6 pad 3.17)
  Bottom 1.27: D7.A 87,51.43 | 87,51.43 87.63,51.43 88.33,50.8 K1.2 | D7.A Q9.C 80.33,53.98 79.69,53.34 79.69,51.75 80.64,50.8 88.27,50.8 v88.58,51.12 85.72,53.98 81.92,53.98 80.64,52.7 80.64,51.43 D7.A | 87,51.43 86.36,52.07 81.28,52.07 81.28,52.7 81.92,53.34 85.09,53.34 85.72,52.7
N$24
  Bottom 1.27: 60.33,53.66 60.33,56.52 R21.1 | Q8.B 60.33,53.34 | 60.33,53.34 60.96,53.98 60.96,58.42 60.33,59.05 58.42,59.05 58.1,58.74 58.1,57.15 | 58.1,55.88 60.33,53.66 | 60.33,53.66 60.33,53.34 | 60.33,53.34 58.1,55.56 58.1,55.88 | 58.1,55.88 58.1,57.15 | 58.1,57.15 58.42,57.47 58.42,56.83 60.01,55.24 60.01,57.78 59.37,58.42
N$25
  Bottom 1.27: 47.62,40 R18.1 46.35,46.35 | 47.62,39.37 IC3.13 IC3.12 47.62,40.64 | C11.+ 49.53,52.07 | 49.53,52.07 48.9,52.07 46.35,49.53 46.35,47.62 | 49.53,52.07 49.53,49.53 46.99,46.99 | 46.67,46.67 46.35,46.35 | 46.35,46.35 46.35,47.62 | 46.35,47.62 48.9,50.16 48.9,50.8 46.99,48.89 46.99,46.99 | 46.99,46.99 46.67,46.67 | 46.67,46.67 46.67,41.59 47.62,40.64 | 47.62,40.64 47.62,40 | 47.62,40 47.62,39.37 | 47.62,39.37 48.26,38.73 50.16,38.73
N$26
  Bottom 1.27: 65.41,29.21 68.58,29.21
N$27
  Bottom 1.27: 100.97,50.8 101.6,51.43 101.6,57.15 95.89,62.86 | 95.89,21.59 95.89,22.23 93.98,24.13 93.34,23.5 | K1.1 100.61,51.78 100.33,52.07 | 100.33,52.07 97.79,54.61 95.89,54.61 | X7.1 83.82,65.41 85.72,67.31 90.17,67.31 | 90.17,67.31 93.34,67.31 | 93.34,67.31 95.89,64.77 | 95.89,64.77 95.89,62.86 | 95.89,61.59 95.89,54.61 | 93.66,24.45 93.66,40.32 91.44,42.54 91.44,43.5 | 93.66,24.45 93.66,22.35 K2.C | 95.89,54.61 95.25,54.61 94.61,53.98 | 92.71,52.07 91.44,50.8 | 91.44,50.8 91.44,49.21 | 91.44,49.21 91.44,46.99 | 91.44,46.99 91.44,46.35 | 91.44,45.4 91.44,43.5 | 86.36,46.99 84.45,45.09 D7.C 84.45,43.5 | 86.36,46.99 87.63,46.99 | 88.9,46.99 91.44,46.99 | 93.34,23.5 93.34,24.13 93.66,24.45 | 84.77,43.5 85.41,43.5 88.27,46.35 | 88.27,46.35 88.9,46.99 | 88.9,46.99 87.63,46.99 | 87.63,46.99 86.36,45.72 | 86.04,45.4 85.09,44.45 85.09,43.81 84.77,43.5 | 84.77,43.5 84.45,43.5 | 84.45,43.5 84.14,43.81 84.14,46.04 85.09,46.99 | 85.09,46.99 86.36,46.99 | 86.36,46.99 86.36,45.72 | 86.36,45.72 86.04,45.4 | 86.04,45.4 86.36,45.4 86.68,45.09 91.12,45.09 91.44,45.4 | 91.44,45.4 91.44,46.35 | 91.44,46.35 91.12,46.67 88.9,46.67 88.27,46.04 90.49,46.04 90.81,45.72 89.22,45.72 | 88.9,45.72 89.22,45.72 | 89.22,45.72 91.44,43.5 | 88.27,46.35 85.72,46.35 85.09,46.99 | 85.09,46.99 86.04,47.94 90.17,47.94 91.44,49.21 | 91.44,50.8 91.44,56.83 92.71,58.1 92.71,64.77 90.17,67.31 | 95.89,62.86 95.89,61.59 | 95.89,61.59 100.97,56.52 100.97,55.24 | 100.97,52.07 100.97,52.7 | 100.97,52.7 100.97,55.24 | 100.97,55.24 96.52,59.69 96.52,58.42 100.33,54.61 100.33,53.34 | 100.33,52.07 100.33,53.34 | 100.33,53.34 96.52,57.15 96.52,55.88 97.16,55.24 98.42,55.24 100.97,52.7
  Bottom 1.27: 91.44,66.68 92.08,66.68 93.98,64.77 93.98,65.41 | 93.98,65.41 92.71,66.68 | 93.98,65.41 95.25,64.14 95.25,55.24 92.71,52.7 | 92.08,52.07 92.08,53.34 94.61,55.88 94.61,64.14 93.34,64.14 93.34,57.15 | 93.34,57.15 93.34,55.88 92.08,54.61 92.08,55.88 93.34,57.15 | 100.97,52.7 92.71,52.7 | 92.71,52.7 92.08,52.07 | 92.08,52.07 92.71,52.07 | 92.71,52.07 94.61,53.98 | 94.61,53.98 97.79,53.98 98.42,53.34 | 95.89,64.77 95.89,66.04 94.61,67.31 93.34,67.31 | 93.34,23.5 93.34,20.96 95.89,20.96 95.89,21.59 | 95.89,21.59 93.98,23.5
N$28  (via drill 0.6 pad 2.18)
  Top 1.27: v74.3,24.77 v53.98,24.77
  Bottom 1.016: 51.44,25.4 54.29,25.4 54.61,25.08 54.61,24.45 54.29,24.13 | 54.61,24.13 53.34,24.13 52.7,24.77
  Bottom 1.27: R9.2 66.04,64.14 63.5,61.59 63.5,55.24 74.3,44.45 v74.3,24.77 | v53.98,24.77 52.7,24.77 52.07,24.77 51.44,25.4 50.16,26.67 IC3.3
N$29
  Bottom 1.27: R9.3 59.69,65.41 55.88,61.59 R11.2 55.88,57.47 | 55.88,57.47 55.56,57.47 55.56,62.23 59.05,65.72 61.28,65.72 61.28,64.77 60.96,64.45 59.69,64.45 56.2,60.96 56.2,57.47 55.88,57.47
N$30
  Bottom 1.016: 51.44,53.66 51.44,48.26 48.9,45.72 48.9,42.54 50.16,41.27 51.44,41.27 52.7,40 IC3.11 | 51.44,54.29 51.44,60.32 48.26,63.5 R8.2 47.94,65.41 47.62,65.09 47.62,63.82 47.62,63.5 | 47.62,63.5 50.16,60.96 50.16,54.93 51.44,53.66 | 51.44,53.66 51.44,53.98 | 51.44,53.98 51.44,54.29 | 51.44,54.29 50.8,54.93 50.8,60.64 | 51.44,53.98 51.12,53.98 49.53,55.56 49.53,60.64 47.62,62.55 47.62,63.5
N$31
  Bottom 0.813: 59.05,5.71 59.05,6.35 | 59.05,6.35 59.05,6.98 62.23,10.16 62.87,10.79 | 62.23,8.89 62.23,8.26 60.33,6.35 59.69,6.35 | 59.69,6.35 59.05,6.35 | 59.05,6.35 61.59,8.89 61.59,8.26 59.69,6.35
  Bottom 1.016: X5.2 59.03,1.93 59.05,1.91 | 60.33,1.91 SJ1.2
  Bottom 1.27: 62.23,9.53 62.23,10.16 Q4.E 62.87,10.79 62.87,10.16 62.23,9.53 | 62.23,9.53 62.23,8.89 62.23,6.98 60.96,5.71 | 60.96,5.71 59.05,5.71 X5.2 | 60.96,5.71 59.05,3.81 | 59.05,3.81 59.05,6.98 | 60.33,1.91 59.05,1.91 59.05,3.81
N$32
  Bottom 1.27: R10.2 43.18,65.33 R8.3 | R10.2 42.55,59.69 42.55,66.04 43.18,66.04 43.81,65.41 43.81,59.69 R10.2
N$33
  Bottom 1.016: 54,6.96 X5.1
  Bottom 1.27: IC3.6 57.78,28.26 59.05,26.99 59.05,22.23 | 59.05,22.23 R19.1 55.24,18.42 | 55.24,18.42 55.24,13.33 | 55.24,13.33 55.24,8.91 53.98,7.62 54,6.96 | 59.05,22.23 59.05,17.15 55.24,13.33 | 55.24,18.42 55.24,18.73 58.74,22.23 58.74,18.1 55.88,15.24 55.88,16.51 58.42,19.05 58.42,20.32 | 58.42,20.96 58.42,20.32 | 58.42,20.32 55.88,17.78
N$34
  Bottom 1.016: 77.47,16.51 77.47,12.7 | 77.47,12.7 76.83,12.7 76.2,13.33 76.2,22.23 77.47,23.5 77.47,24.77 | 77.47,24.77 77.47,25.4 77.47,26.67 78.11,27.31 78.11,13.33 77.47,12.7 | 77.47,12.7 76.83,13.33 76.83,17.15 | 77.47,24.77 77.15,24.77 77.15,22.23 76.83,21.91 76.83,27.31 78.42,28.89 80.96,28.89 81.6,29.53
  Bottom 1.27: Q7.E 74.3,50.8 79.38,45.72 79.38,34.29 81.92,31.75 81.92,29.85 81.6,29.53 80.64,28.58 | 80.64,28.58 D6.C 78.11,27.31 77.34,26.54 C9.+ | 80.64,28.58 77.47,25.4
N$35
  Bottom 1.27: Q9.B 83.82,56.52 82.23,56.52 | 82.23,56.52 81.92,56.52 | 81.92,56.52 81.28,57.15 | R22.1 80.64,57.78 81.28,57.15 | 81.28,57.15 81.28,57.47 | 81.28,57.47 81.28,58.42 80.64,59.05 80.33,59.05 79.69,58.42 79.69,57.15 80.33,56.52 81.92,56.52 | 82.23,56.52 81.28,57.47
N$36
  Bottom 1.27: 91.44,38.1 91.44,39.37 88.61,42.2 K3.1 88.55,42.26 | 91.44,37.15 91.44,35.56 | 91.44,35.56 91.44,34.29 | 91.44,33.02 91.44,26.04 89.53,24.13 | K2.NO 88.61,10.16 | 88.61,10.16 K2.1 88.61,23.21 | X7.2 78.11,64.75 78.11,60.32 77.47,59.69 77.47,50.8 81.92,46.35 81.92,42.54 83.19,41.27 85.72,41.27 | 89.53,24.13 88.61,23.21 | 88.61,10.16 D8.C 84.77,10.16 | 85.72,41.27 88.27,38.73 | 88.27,38.73 91.44,35.56 | 84.77,10.16 84.77,10.48 88.27,13.97 | 88.27,13.97 88.27,19.05 | 88.27,19.05 88.27,19.37 | 88.27,13.97 88.27,12.7 86.04,10.48 87.63,10.48 88.58,11.43 86.04,11.43 84.77,10.16 | 84.77,10.16 84.77,9.84 87.95,6.67 87.95,9.53 88.27,9.84 86.04,9.84 87.63,8.26 87.63,7.62 88.9,6.35 89.85,7.3 89.85,9.21 88.58,10.48 88.58,9.84 89.53,8.89 89.53,24.13 | 88.61,23.21 87.63,22.23 87.63,19.69 88.27,19.05 | 85.72,41.27 86.04,41.27 87.95,43.18 88.9,43.18 89.53,42.54 89.53,40 91.44,38.1 | 91.44,38.1 91.44,37.15 | 91.44,37.15 87.95,40.64 86.68,40.64 86.36,40.96 87.31,40.96 87.95,41.59 88.9,40.64 | 88.9,38.73 88.27,38.73 | 88.27,37.46 88.27,36.2 | 88.27,36.2 90.17,34.29 | 91.44,33.02 91.44,34.29 | 91.44,34.29 88.27,37.46 | 88.27,37.46 88.27,38.73 | 88.27,36.2 88.27,34.92 88.9,34.29 90.17,34.29 | 90.17,34.29 91.44,33.02
N$37
  Bottom 1.27: Q8.C 64.14,50.8 | 64.14,50.8 65.09,49.85 | 65.09,49.85 71.12,43.81 | 71.12,43.81 71.75,43.18 | 71.75,43.18 SG1.- 71.75,39.37 71.44,39.37 71.12,39.69 71.12,43.81 | 71.75,43.18 72.39,42.54 72.39,39.69 | Q8.C 62.87,51.43 62.87,51.75 63.18,51.75 64.14,50.8 | 65.09,49.85 62.87,49.85 | 62.87,50.16 Q8.C
N$38
  Bottom 1.016: OK1.6 26.04,13.33
  Bottom 1.27: 6.35,13.33 X4.2 7.62,13.33 | 7.62,13.33 11.43,17.15 24.13,17.15 25.4,15.88 | 7.62,13.33 8.89,13.33 11.43,15.88 24.13,15.88 | 25.4,15.88 OK1.6 25.4,11.43 27.3,9.53 | 25.4,15.88 24.13,15.88 | 26.67,5.71 26.67,6.98 | 26.67,6.98 26.67,12.7 26.04,13.33 | 26.67,4.45 R5.2 26.67,5.71 | 26.67,4.45 25.4,4.45 25.4,5.71 | 26.67,5.71 25.4,5.71 | 25.4,5.71 26.67,6.98 | 26.67,4.45 27.3,4.45 27.3,9.53 | 27.3,13.33 27.3,13.97 25.4,15.88 | 27.3,9.53 27.3,13.33 | 27.3,13.33 26.04,14.61 25.4,14.61 24.13,15.88
N$39
  Bottom 1.27: 24.13,41.91 20.32,41.91
N$40
  Bottom 1.27: 100.33,46.35 100.33,42.54 K3.2 100.33,42.29 100.33,41.27 98.11,39.05 | K1.C 97.6,49.09 100.33,46.35 | 100.61,23.85 K2.2 100.61,11.08 | 100.61,23.85 99.69,24.77 | 99.69,24.77 98.11,26.35 98.11,32.38 | 98.11,33.97 98.11,39.05 | 85.72,1.91 D8.A 85.72,2.54 | 85.72,1.91 86.36,1.91 | 86.36,1.91 91.44,1.91 | 91.44,1.91 92.71,3.17 | 97.79,8.26 99.69,10.16 | 99.69,10.16 100.61,11.08 | 99.69,24.77 99.69,10.16 | 100.61,11.08 101.6,12.06 101.6,22.86 100.61,23.85 | 98.11,39.05 98.11,47.31 97.16,48.26 | 97.16,48.26 95.25,48.26 | 97.16,48.26 97.47,48.26 99.38,46.35 99.38,40.64 99.06,40.32 99.06,45.09 100.33,46.35 | 100.33,46.35 101.6,45.09 101.6,41.91 | 101.6,41.27 101.6,35.88 98.11,32.38 | 98.11,32.38 98.11,33.97 | 98.11,33.97 101.28,37.15 101.28,41.59 101.6,41.91 | 101.6,41.91 101.6,41.27 | 101.6,41.27 98.42,38.1 98.42,36.2 99.06,35.56 99.06,36.2 | 99.06,36.2 99.06,37.46 100.97,39.37 100.97,38.1 99.06,36.2 | 85.72,2.54 86.36,1.91 | 85.72,2.54 85.09,3.17 83.82,3.17 83.19,2.54 83.19,1.91 85.72,1.91 | 91.44,1.91 95.89,1.91 97.79,3.81 97.79,8.26 | 97.79,8.26 92.71,3.17 | 92.71,3.17 93.34,2.54 94.61,2.54 | 94.61,2.54 95.25,2.54 97.16,4.45 97.16,5.08 | 97.16,5.08 97.16,6.35 93.98,3.17 | 94.61,2.54 97.16,5.08
N$41
  Bottom 1.27: X8.1 75.59,8.91 76.83,10.16 81.28,10.16 86.36,15.24 86.36,17.15 85.09,18.42 85.09,22.86 | 85.09,24.13 85.09,26.54 | 85.09,26.54 K3.NO | 85.09,26.54 85.09,29.85 87,31.75 88.9,31.75 89.53,31.12 89.53,27.31 85.09,22.86 | 85.09,22.86 85.09,24.13 | 85.09,24.13 88.9,27.94 88.9,31.12 87.63,31.12 85.72,29.21 85.72,27.94 | 85.72,27.31 85.72,27.94 | 85.72,27.94 87.63,29.85 87.63,29.21 88.27,28.58 85.72,26.04
N$42
  Bottom 1.27: 64.77,5.71 65.41,5.71 65.41,6.98 68.58,10.16 | X6.1 64.8,7.01 69.22,10.79 R14.1 | R14.1 69.22,13.33 | 69.22,13.33 68.58,13.33 68.58,10.16 | 68.58,10.16 69.85,11.43 | 69.85,11.43 69.85,13.33 69.22,13.33 | 69.85,11.43 R14.1 | R14.1 64.77,6.98
N$43
  Bottom 1.27: R23.2 32.38,39.37 H1.B2,8
N$44  (via drill 0.6 pad 3.81)
  other vias: 43.18,65.41
N$45  (via drill 0.6 pad 3.81)
  other vias: 48.26,65.41
N$46  (via drill 0.6 pad 3.81)
  other vias: 53.18,65.41
N$47  (via drill 0.6 pad 3.81)
  other vias: 60.96,65.41
N$48  (via drill 0.6 pad 3.81)
  other vias: 66.04,65.41
N$49  (via drill 0.6 pad 3.81)
  other vias: 70.96,65.41
N$50  (via drill 0.6 pad 3.81)
  other vias: 94.61,49.05
N$51  (via drill 0.6 pad 3.81)
  other vias: 94.61,44.29
N$52  (via drill 0.6 pad 3.81)
  other vias: 94.61,21.43
N$53
  Bottom 1.016: SJ4.2 59.4,35.21 57.78,36.83 IC3.9
N$54  (via drill 0.6 pad 3.17)
  other vias: 88.58,30
N$55  (via drill 0.6 pad 3.17)
  other vias: 88.58,19.37
N$56  (via drill 0.6 pad 3.17)
  other vias: 88.58,7.14
N$57  (via drill 0.6 pad 3.17)
  other vias: 100.65,19.37
N$58  (via drill 0.6 pad 3.17)
  other vias: 88.58,42.23
N$59  (via drill 0.6 pad 3.17)
  other vias: 100.65,42.23
N$60  (via drill 0.6 pad 3.17)
  other vias: 100.65,51.12
N$61
  Bottom 1.27: 75.56,5.71 75.56,6.67 75.25,6.98 75.25,9.21 76.52,10.48 81.6,10.48 82.55,11.43
N$62  (via drill 0.6 pad 3.17)
  other vias: 88.58,63.18
N$63
  Bottom 1.016: 16.51,38.1 17.78,38.1
N$64  (via drill 0.6 pad 3.81)
  Bottom 1.016: 5.71,29.85 5.71,30.48 6.35,31.12 v6.35,35.56 6.35,34.92 6.99,34.29 | 6.99,34.29 6.99,31.12 | 6.99,34.29 6.99,34.92 5.71,36.2 7.62,38.1 7.62,36.83 6.99,36.2 | 15.24,34.29 15.56,34.29 15.56,34.92 15.24,35.24 8.89,35.24 7.62,36.51 7.62,35.88 8.57,34.92 7.62,33.97 | 7.62,31.75 7.62,33.02 9.21,34.61 10.48,34.61 12.06,33.02 13.65,34.61 | R6.1 12.06,27.62 | 12.06,27.62 11.75,27.62 11.11,28.26 11.11,33.34 10.48,33.97 11.43,33.97 11.43,28.26 12.06,27.62 | 12.06,27.62 12.38,27.62 13.02,28.26 13.02,33.02 14.29,34.29
  Bottom 1.27: IC2.7 IC2.6 7.62,38.1 7.62,36.51 7.62,34.84 | R7.1 7.62,34.84 | R7.2 7.62,30.48 7.62,31.75 7.62,33.97 7.62,34.29 | 7.62,34.29 7.62,34.84 | C6.+ 15.24,34.29 14.29,34.29 12.06,34.29 | 12.06,34.29 7.62,34.29 | R6.1 12.06,33.02 12.06,34.29
N$65
  Bottom 1.27: 25.4,22.86 26.67,21.59 32.38,21.59 R4.1 | OK1.1 R4.1 | R4.1 32.38,20.32 27.3,20.32 26.04,20.32 | 26.04,20.32 OK1.1 | OK1.1 25.4,20.32 26.04,20.32
N$66  (via drill 0.6 pad 2.18)
  Top 1.27: v40.96,46.04 v56.83,46.04
  Bottom 1.27: 57.15,46.35 56.83,46.35 58.74,44.45 63.82,44.45 64.45,43.81 | 64.45,43.81 R16.1 59.05,43.81 | 64.45,43.81 64.77,43.5 | 64.77,43.5 66.99,41.27 66.99,38.73 | 66.99,38.73 65.41,37.15 62.55,37.15 | 62.55,37.15 61.28,37.15 IC3.8 | 40.64,41.27 40.64,45.72 v40.96,46.04 | v56.83,46.04 58.74,44.13 | 58.74,44.13 59.05,43.81 | Q5.C 40.64,40.64 | 40.64,40.64 40.64,41.27 | 40.64,41.27 39.37,42.54 39.37,46.35 41.27,46.35 41.27,41.27 40.64,40.64 | 64.77,43.5 59.37,43.5 | 59.37,43.5 59.05,43.81 | 58.74,44.13 58.1,44.13 | 58.1,44.13 56.52,45.72 | 58.1,44.13 58.74,43.5 59.37,43.5 | 60.33,38.73 60.96,38.73 62.55,37.15 | 62.55,37.15 63.5,36.2 63.5,34.92 64.45,33.97 65.72,33.97 66.99,35.24 66.99,38.1 | 66.99,38.73 66.99,38.1 | 66.99,38.1 65.72,36.83 64.77,36.83 64.45,36.51 64.45,34.92 64.77,34.92 65.09,34.61 65.41,34.61 66.36,35.56 66.36,36.51 65.41,35.56
N$68
  Bottom 1.27: 95.25,44.45 95.57,44.45 95.89,44.13 95.89,41.27 | K3.C 94.61,42.54 | 94.61,42.54 95.89,41.27 | 95.89,41.27 95.89,25.72 97.79,23.81 97.79,11.43 90.17,3.81 87.63,3.81 85.72,5.71 | 82.55,5.71 X8.2 | 94.61,42.54 93.98,43.18 | 85.72,5.71 84.45,6.98 80.64,6.98 80.64,4.45 81.28,4.45 82.55,5.71 | 85.72,5.71 82.55,5.71

## Text on the board
Bottom: SPS | 2014
tPlace: OSTIV | NAGREV | CK | CA | MOSHNOST
tNames: PEDAL | AC 12V | COOL* | CMD v1.6 | SPS | HEAT* | (A2) | (G) | (A1) | HEAT-LED | OTZHIG | GERKON | COOL-LED | KLAPAN
tValues: OSTIV | NAGREV | MOSHNOST